# Altium PCB 红外.PcbDoc
Units mm, origin at the board's own origin, x right, y up, seen from the top; angles counter-clockwise.
Board outline 152.4 x 101.6 mm, 2 copper layers (Top Layer, Bottom Layer); 10 components, 10 nets, 40 pads, 0 vias.
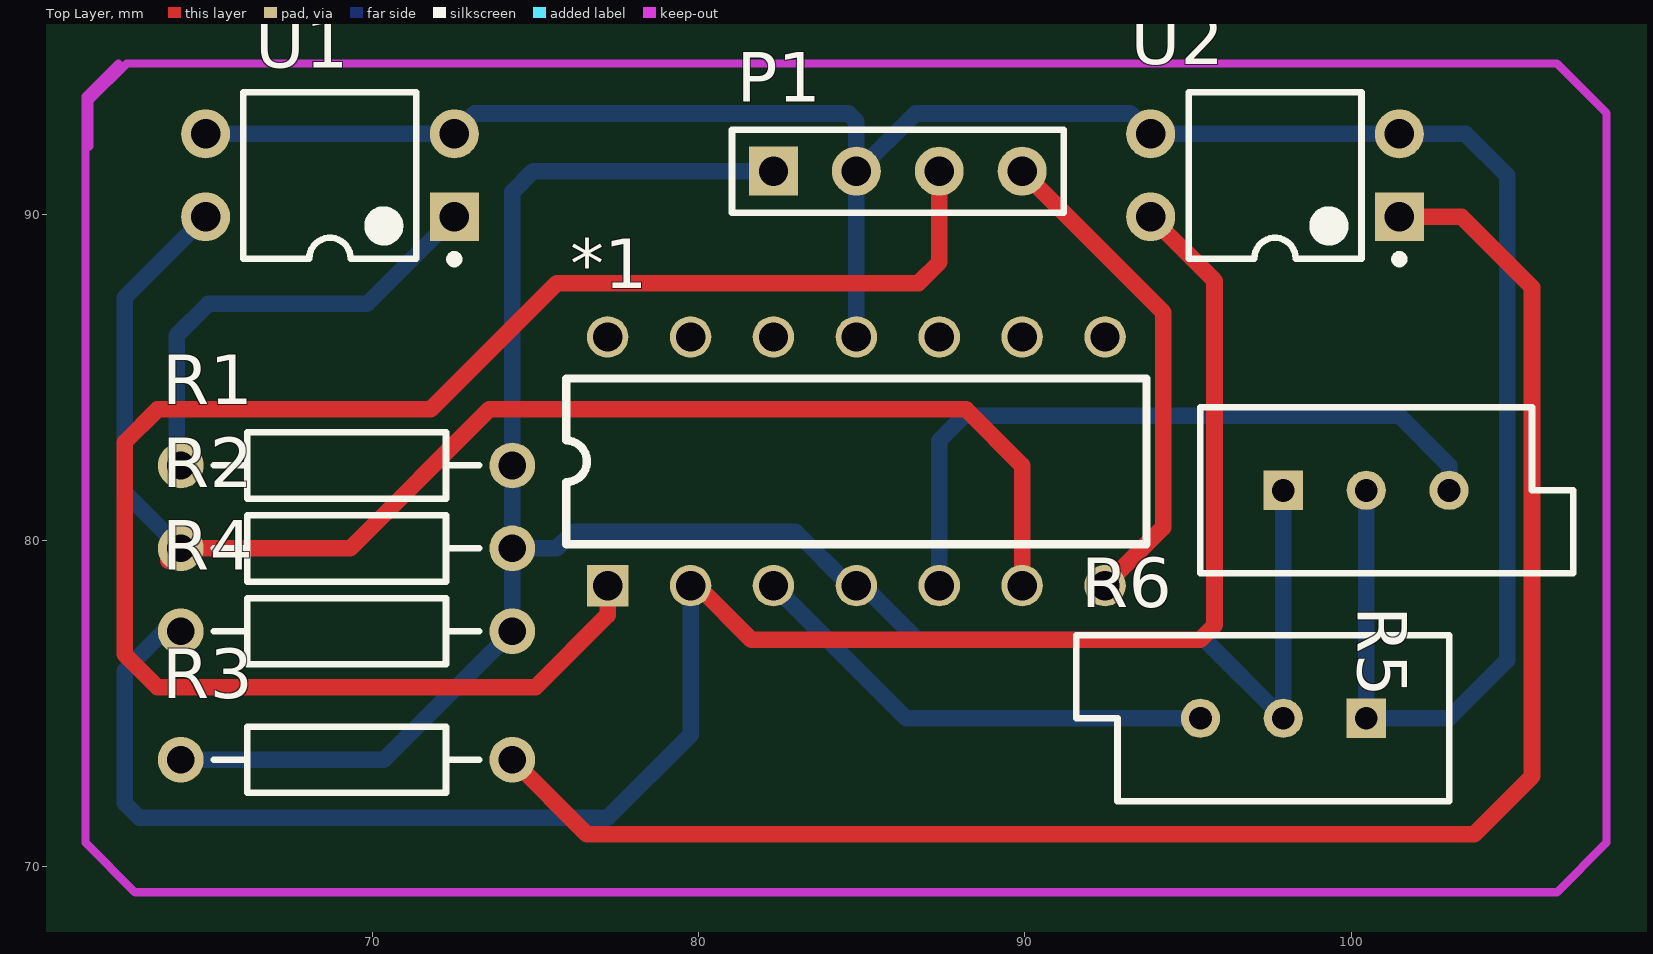
[diagram p0: Top Layer view]
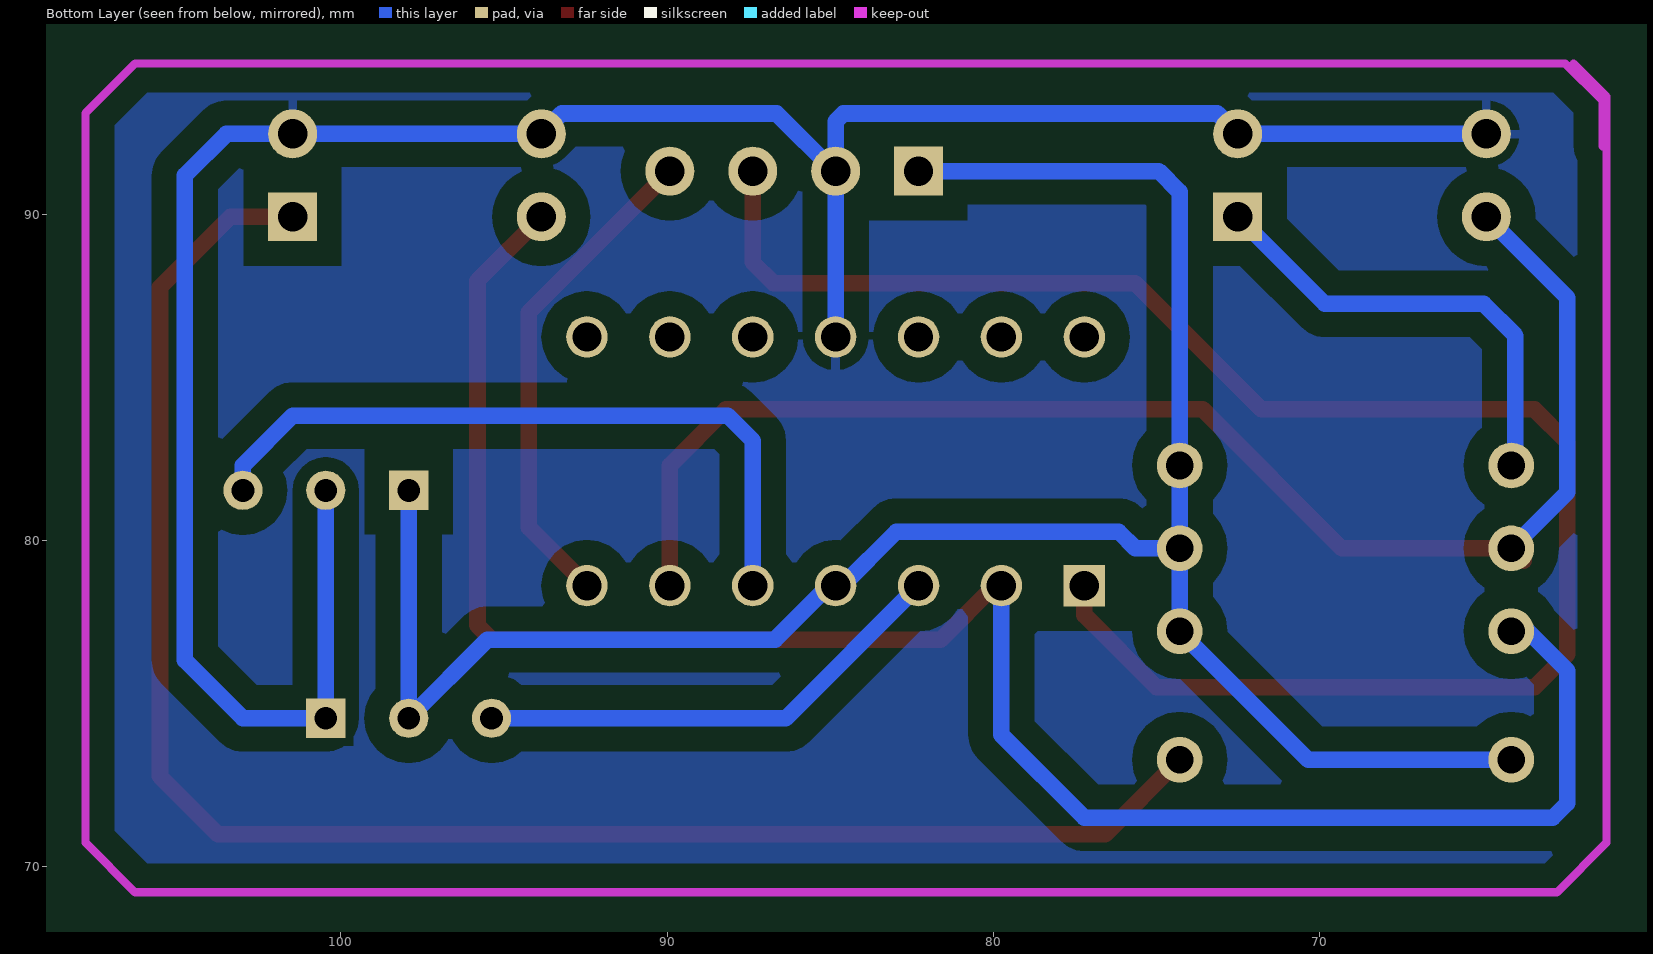
[diagram p1: Bottom Layer view, seen from below]

## Layer stack, top to bottom
Top Solder: solder mask 0.0102, Solder Resist, Dk 3.5
Top Layer: signal copper 0.0356
Dielectric 1: dielectric 0.32, FR-4, Dk 4.8
Bottom Layer: signal copper 0.0356
Bottom Solder: solder mask 0.0102, Solder Resist, Dk 3.5

## Board outline
25.4,25.4 177.8,25.4 177.8,127 25.4,127

## Design rules (kind name [scope] priority, off if disabled: settings)
Clearance [All] p1: gap=0.762
PolygonConnect [All] p1: connectstyle=Relief reliefconductorwidth=0.254 reliefentries=4 polygonreliefangle="90 Angle" airgapwidth=0.254
RoutingVias [All] p1: holewidth=0.711 width=1.27 viastyle="Through Hole" minholewidth=0.711 minwidth=1.27 maxholewidth=0.711 maxwidth=1.27
SolderMaskExpansion [All] p1: expansion=0.102
Width [All] p1: maxlimit=0.762 minlimit=0.508 preferedwidth=0.635
29 further rules are at their usual default settings.

## Components (designator, comment, footprint, x,y, rotation, side; value= is the part's Value field where it differs from the comment)
*1 "LM324" DIP14 77.216,78.613 r90 top
P1 "Header 4" HDR1X4 82.296,91.313 r0 top
R1 "Res2" AXIAL-0.4 69.215,82.296 r0 top
R2 "Res2" AXIAL-0.4 69.215,79.756 r0 top
R3 "Res2" AXIAL-0.4 69.215,73.279 r180 top
R4 "Res2" AXIAL-0.4 69.215,77.216 r0 top
R5 "1K" VR5 100.457,81.534 r0 top
R6 "1K" VR5 97.917,74.549 r180 top
U1 "TCRT5000" DIP-4 68.707,91.186 r180 top
U2 "TCRT5000" DIP-4 97.663,91.186 r180 top

## Footprints (in the part's own frame and the unit in brackets; to place one, negate y for a bottom-side part, rotate by r counter-clockwise, add the part's x,y. Pads: shape width x height; smd on the part's side, far side on the other; paste and mask are expansions set on the pad)
AXIAL-0.4 [mm] "Axial Device, Thru-Hole; 2 Leads; 0.4 in Pin Spacing"
  round 1.4 hole 0.85: 1(-5.08,0) 2(5.08,0)
  silkscreen extent -4.06,-1.02 4.06,1.02
DIP14 [mm]
  rect 1.27x1.27 hole 0.9: 1(0,0)
  round 1.27 hole 0.9: 2(0,-2.54) 3(0,-5.08) 4(0,-7.62) 5(0,-10.16) 6(0,-12.7) 7(0,-15.24) 8(7.62,-15.24) 9(7.62,-12.7) 10(7.62,-10.16) 11(7.62,-7.62) 12(7.62,-5.08) 13(7.62,-2.54) 14(7.62,0)
  silkscreen extent 1.27,-16.51 6.35,1.27
DIP-4 [mm] "DIP; 4 Leads; Row Spacing 7.62 mm; Pitch 2.54 mm"
  rect 1.5x1.5 hole 0.9: 1(-3.81,1.27)
  round 1.5 hole 0.9: 2(-3.81,-1.27) 3(3.81,-1.27) 4(3.81,1.27)
  silkscreen extent -3.94,-2.55 2.65,2.69, body extent -3.15,-2.5 3.15,2.5, height 5.6
HDR1X4 [mm] "Connector; Header; 4 Position"
  rect 1.5x1.5 hole 0.9: 1(0,0)
  round 1.5 hole 0.9: 2(2.54,0) 3(5.08,0) 4(7.62,0)
  silkscreen extent -1.27,-1.27 8.89,1.27
VR5 [mm] "Thru-Hole; 3 Leads"
  rect 1.2x1.2 hole 0.7: 1(-2.54,0)
  round 1.2 hole 0.7: 2(0,0) 3(2.54,0)
  silkscreen extent -5.08,-2.54 6.35,2.54

## Part data
P1: "Header, 4-Pin"
R1 R2 R3 R4: "Resistor"
R5 R6: library part RESVR, "Potentiometer"
U1 U2: library part Optoisolator1, "4-Pin Phototransistor Optocoupler"

## Nets (pads, with @x,y where several pads share a name; then routed paths per layer and width w, separated by ;. In a path a pad name is that pad's centre, name@x,y a point inside that pad or via, vN(x,y) a via of type N, cw(c..) or ccw(c..) an arc to the next point about the centre after c; other vN are vias at no path point)
GND: *1.11 P1.2 R5.2 R6.1 U1.2 U1.3 U2.2 U2.3 | length 75.3
  Bottom Layer w0.508: U1.3 U1.2 73.14,93.079 84.594,93.079 84.836,92.837 P1.2 ; *1.11 P1.2 ; R5.2 R6.1 102.997,74.549 104.775,76.327 104.775,91.186 103.505,92.456 U2.2 U2.3 93.23,93.079 86.645,93.079 84.878,91.313 P1.2
Net*1_2: *1.2 R4.1 U2.4 | length 59.7
  Top Layer w0.508: *1.2 79.961,78.613 81.612,76.962 95.377,76.962 95.809,77.394 95.809,87.96 U2.4
  Bottom Layer w0.508: R4.1 63.627,77.216 62.419,76.008 62.419,71.947 62.865,71.501 77.216,71.501 79.756,74.041 *1.2
Net*1_3: *1.3 R6.3 | length 14.8
  Bottom Layer w0.508: *1.3 86.36,74.549 R6.3
Net*1_5: *1.5 R5.3 | length 21.8
  Bottom Layer w0.508: *1.5 87.376,83.058 88.138,83.82 101.473,83.82 102.997,82.296 R5.3
Net*1_6: *1.6 R2.1 U1.4 | length 44.4
  Top Layer w0.508: R2.1@63.754,79.375 R2.1 69.328,79.756 73.584,84.012 88.203,84.012 89.916,82.299 *1.6
  Bottom Layer w0.508: R2.1@64.121,79.756 R2.1 62.419,81.472 62.419,87.438 U1.4
NetR1_1: R1.1 U1.1 | length 14
  Bottom Layer w0.508: R1.1@64.008,82.296 64.008,86.275 64.982,87.249 69.85,87.249 U1.1
NetR3_1: R3.1 U2.1 | length 52.9
  Top Layer w0.508: R3.1 76.581,70.993 103.759,70.993 105.537,72.771 105.537,87.757 103.378,89.916 U2.1
OUT2: *1.7 P1.4 | length 15.3
  Top Layer w0.508: P1.4 94.234,86.995 94.234,80.391 *1.7 *1.7@92.456,78.71
OUT3: *1.1 P1.3 | length 53.6
  Top Layer w0.508: *1.1 77.216,77.71 75.006,75.5 63.424,75.5 62.419,76.505 62.419,83.007 63.424,84.012 71.788,84.012 75.66,87.884 86.741,87.884 87.376,88.519 P1.3
  Bottom Layer w0.508: P1.3@87.334,91.313 P1.3
VCC5: *1.4 P1.1 R1.2 R2.2 R3.2 R4.2 R5.1 R6.2 | length 66.7
  Bottom Layer w0.508: R3.2 70.358,73.279 R4.2 R2.2 ; P1.1 74.93,91.313 74.295,90.678 R1.2 R2.2 ; R5.1 R6.2 95.504,76.962 86.692,76.962 85.041,78.613 *1.4 84.631,78.613 82.98,80.264 76.16,80.264 75.652,79.756 R2.2
pads on no net: *1.8 *1.9 *1.10 *1.12 *1.13 *1.14

## Polygon pours and split planes (outlines as drawn)
GND on Bottom Layer "Top Layer-No Net" (solid, pour order 2): 61.531,93.98 61.151,93.599 61.151,70.739 62.674,69.215 106.236,69.215 107.759,70.739 107.759,93.091 107.632,93.091 105.981,94.742 62.674,94.742 62.42,94.996

## Keep-outs
Keep-Out Layer:
  lines w0.254: 61.341,92.075 61.341,93.472 62.484,94.615 106.299,94.615 107.823,93.091 107.823,70.739 106.299,69.215 62.738,69.215 61.214,70.739 61.214,93.599 62.23,94.615